# Altium PCB PCB2.PcbDoc
Units mil, origin at the board's own origin, x right, y up, seen from the top; angles counter-clockwise.
Board outline 6000 x 4000 mil, 2 copper layers (Top Layer, Bottom Layer); 2 components, 0 nets, 139 pads, 25 vias.
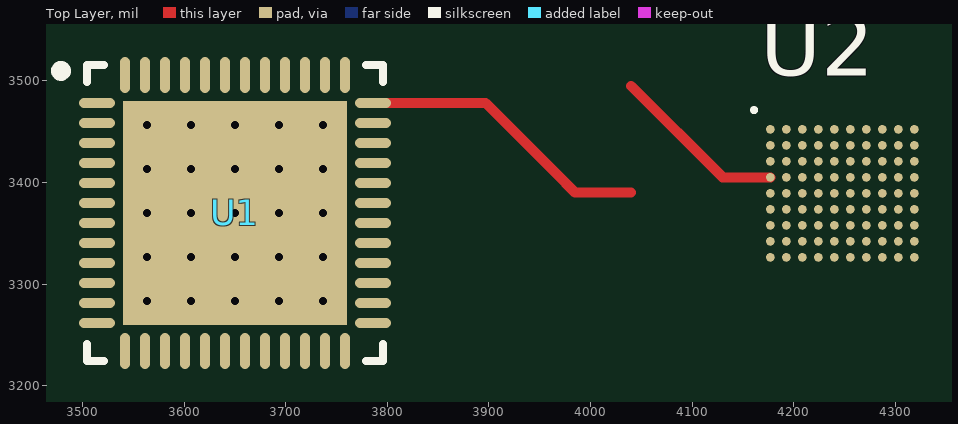
[diagram p0: Top Layer view]
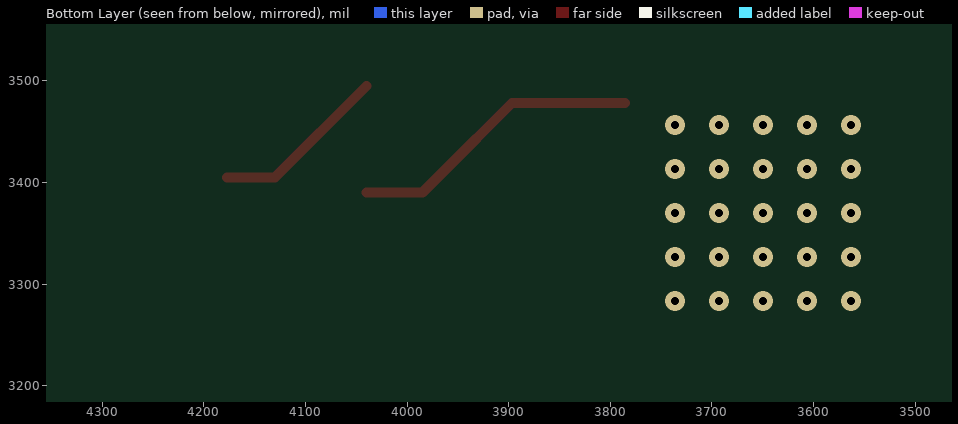
[diagram p1: Bottom Layer view, seen from below]

## Layer stack, top to bottom
Top Solder: solder mask 0.4, Solder Resist, Dk 3.5
Top Layer: signal copper 1.4
Dielectric 1: dielectric 12.6, FR-4, Dk 4.8
Bottom Layer: signal copper 1.4
Bottom Solder: solder mask 0.4, Solder Resist, Dk 3.5

## Board outline
1000,1000 7000,1000 7000,5000 1000,5000

## Design rules (kind name [scope] priority, off if disabled: settings)
Clearance [All] p1: gap=10 ignorepadtopadclearanceinfootprint=FALSE
PolygonConnect [All] p1: connectstyle=Relief reliefconductorwidth=10 reliefentries=4 polygonreliefangle="90 Angle" airgapwidth=10
RoutingVias [All] p1: holewidth=28 width=50 viastyle="Through Hole" minholewidth=28 minwidth=50 maxholewidth=28 maxwidth=50
SolderMaskExpansion [All] p1: expansion=4 istentingtop=FALSE
Width [All] p1: maxlimit=10 minlimit=10 preferedwidth=10
30 further rules are at their usual default settings.

## Components (designator, comment, footprint, x,y, rotation, side; value= is the part's Value field where it differs from the comment)
U1 "STM32F401CBU6" STM-UFQFPN48_N 3650,3370 r0 top
U2 "STM32F405OG" STM-WLCSP90 4247.87,3389.25 r0 top

## Footprints (in the part's own frame and the unit in brackets; to place one, negate y for a bottom-side part, rotate by r counter-clockwise, add the part's x,y. Pads: shape width x height; smd on the part's side, far side on the other; paste and mask are expansions set on the pad)
STM-UFQFPN48_N [mm] "QFN, 48-Leads, Body 7.1x7.1mm, Pitch 0.5mm, Thermal Pad 5.6x5.6mm, IPC Medium Density"
  oval 0.9x0.25 smd: 1(-3.45,2.75) 2(-3.45,2.25) 3(-3.45,1.75) 4(-3.45,1.25) 5(-3.45,0.75) 6(-3.45,0.25) 7(-3.45,-0.25) 8(-3.45,-0.75) 9(-3.45,-1.25) 10(-3.45,-1.75) 11(-3.45,-2.25) 12(-3.45,-2.75) 25(3.45,-2.75) 26(3.45,-2.25) 27(3.45,-1.75) 28(3.45,-1.25) 29(3.45,-0.75) 30(3.45,-0.25) 31(3.45,0.25) 32(3.45,0.75) 33(3.45,1.25) 34(3.45,1.75) 35(3.45,2.25) 36(3.45,2.75)
  oval 0.25x0.9 smd: 13(-2.75,-3.45) 14(-2.25,-3.45) 15(-1.75,-3.45) 16(-1.25,-3.45) 17(-0.75,-3.45) 18(-0.25,-3.45) 19(0.25,-3.45) 20(0.75,-3.45) 21(1.25,-3.45) 22(1.75,-3.45) 23(2.25,-3.45) 24(2.75,-3.45) 37(2.75,3.45) 38(2.25,3.45) 39(1.75,3.45) 40(1.25,3.45) 41(0.75,3.45) 42(0.25,3.45) 43(-0.25,3.45) 44(-0.75,3.45) 45(-1.25,3.45) 46(-1.75,3.45) 47(-2.25,3.45) 48(-2.75,3.45)
  rect 5.6x5.6 smd: 49(0,0)
  silkscreen extent -4.47,-3.7 3.7,3.7, body extent -3.55,-3.55 3.55,3.55, height 0.6
STM-WLCSP90 [mm] "BGA, 90-Leads, Body 3.97x4.22mm, Pitch 0.4mm"
  round 0.22 smd: A1(-1.8,1.6) A2(-1.4,1.6) A3(-1,1.6) A4(-0.6,1.6) A5(-0.2,1.6) A6(0.2,1.6) A7(0.6,1.6) A8(1,1.6) A9(1.4,1.6) A10(1.8,1.6) B1(-1.8,1.2) B2(-1.4,1.2) B3(-1,1.2) B4(-0.6,1.2) B5(-0.2,1.2) B6(0.2,1.2) B7(0.6,1.2) B8(1,1.2) B9(1.4,1.2) B10(1.8,1.2) C1(-1.8,0.8) C2(-1.4,0.8) C3(-1,0.8) C4(-0.6,0.8) C5(-0.2,0.8) C6(0.2,0.8) C7(0.6,0.8) C8(1,0.8) C9(1.4,0.8) C10(1.8,0.8) D1(-1.8,0.4) D2(-1.4,0.4) D3(-1,0.4) D4(-0.6,0.4) D5(-0.2,0.4) D6(0.2,0.4) D7(0.6,0.4) D8(1,0.4) D9(1.4,0.4) D10(1.8,0.4) E1(-1.8,0) E2(-1.4,0) E3(-1,0) E4(-0.6,0) E5(-0.2,0) E6(0.2,0) E7(0.6,0) E8(1,0) E9(1.4,0) E10(1.8,0) F1(-1.8,-0.4) F2(-1.4,-0.4) F3(-1,-0.4) F4(-0.6,-0.4) F5(-0.2,-0.4) F6(0.2,-0.4) F7(0.6,-0.4) F8(1,-0.4) F9(1.4,-0.4) F10(1.8,-0.4) G1(-1.8,-0.8) G2(-1.4,-0.8) G3(-1,-0.8) G4(-0.6,-0.8) G5(-0.2,-0.8) G6(0.2,-0.8) G7(0.6,-0.8) G8(1,-0.8) G9(1.4,-0.8) G10(1.8,-0.8) H1(-1.8,-1.2) H2(-1.4,-1.2) H3(-1,-1.2) H4(-0.6,-1.2) H5(-0.2,-1.2) H6(0.2,-1.2) H7(0.6,-1.2) H8(1,-1.2) H9(1.4,-1.2) H10(1.8,-1.2) J1(-1.8,-1.6) J2(-1.4,-1.6) J3(-1,-1.6) J4(-0.6,-1.6) J5(-0.2,-1.6) J6(0.2,-1.6) J7(0.6,-1.6) J8(1,-1.6) J9(1.4,-1.6) J10(1.8,-1.6)
  silkscreen extent -2.26,2.03 -2.16,2.13, body extent -2.11,-1.98 2.11,1.98, height 0.62

## Part data
U1: "ARM Cortex-M4 32-bit MCU+FPU, 105 DMIPS, 128 kB Flash, 64 kB Internal RAM, 36 I/Os, 48-pin UFQFPN, -40 to 85 degC, Tray", I/Os (High Current)=36, Manufacturer=STMicroelectronics, Operating Frequency(F) (Processor speed) (MHz)=84, Supplier Part Number 1=19X6215, Supply Voltage(Vcc) max (V)=3.6, Supply Voltage(Vcc) min (V)=1.8, ComponentLink1Description="Manufacturer URL", ComponentLink1URL=http://www.st.com/web/en/home.html, ComponentLink2Description=Datasheet, ComponentLink2URL=http://www.st.com/st-web-ui/static/active/en/resource/technical/document/data_brief/DM00071938.pdf, ComponentLink3Description="Package Specification", ComponentLink3URL=http://www.st.com/st-web-ui/static/active/en/resource/technical/document/data_brief/DM00071938.pdf, Core="ARM Cortex-M4", DatasheetVersion="Rev. 1", FLASH Size (Prog) (kB)=128, Internal RAM Size (kB)=64, Mounting Technology="Surface Mount", PackageDescription="48-Pin Ultra Thin Fine Pitch Quad Flat No-Lead, 7 x 7 x 0.6 mm Body, 0.5 mm Pitch, Exposed Pad", PackageReference=UFQFPN48, PackageVersion="Rev. 1, 04/2013", Packing=Tray, PartNumber=STM32F401CBU6, Supplier 1=Newark, Supplier 2=Mouser, Supplier Part Number 2=511-STM32F401CBU6
U2: "ARM Cortex-M4 32-bit MCU+FPU, 210 DMIPS, 1024 kB Flash, 192 kB Internal RAM, 72 I/Os, 90-pin WLCSP", I/Os (High Current)=72, Manufacturer=STMicroelectronics, Operating Frequency(F) (Processor speed) (MHz)=168, Supply Voltage(Vcc) max (V)=3.6, Supply Voltage(Vcc) min (V)=1.8, ComponentLink1Description="Manufacturer URL", ComponentLink1URL=http://www.st.com/web/en/home.html, ComponentLink2Description=Datasheet, ComponentLink2URL=http://www.st.com/st-web-ui/static/active/en/resource/technical/document/datasheet/DM00037051.pdf, ComponentLink3Description="Package Specification", ComponentLink3URL=http://www.st.com/st-web-ui/static/active/en/resource/technical/document/datasheet/DM00035129.pdf, Core="ARM Cortex-M4", D/A Converter=2x12-bit, DatasheetVersion="Rev. 4", FLASH Size (Prog) (kB)=1024, Internal RAM Size (kB)=192, Mounting Technology="Surface Mount", PackageDescription="90-Ball Wafer Level Chip Size Package, 0.4 mm Pitch", PackageReference=WLCSP90, PackageVersion="Rev. 4, 06/2013", PartNumber=STM32F405OG

## Via types
v1: diameter 19.68, hole 7.87, Top Layer to Bottom Layer, 25 vias

## Nets (pads, with @x,y where several pads share a name; then routed paths per layer and width w, separated by ;. In a path a pad name is that pad's centre, name@x,y a point inside that pad or via, vN(x,y) a via of type N, cw(c..) or ccw(c..) an arc to the next point about the centre after c; other vN are vias at no path point)
pads on no net: U1.1 U1.2 U1.3 U1.4 U1.5 U1.6 U1.7 U1.8 U1.9 U1.10 U1.11 U1.12 U1.13 U1.14 U1.15 U1.16 U1.17 U1.18 U1.19 U1.20 U1.21 U1.22 U1.23 U1.24 U1.25 U1.26 U1.27 U1.28 U1.29 U1.30 U1.31 U1.32 U1.33 U1.34 U1.35 U1.36 U1.37 U1.38 U1.39 U1.40 U1.41 U1.42 U1.43 U1.44 U1.45 U1.46 U1.47 U1.48 U1.49 U2.A1 U2.A2 U2.A3 U2.A4 U2.A5 U2.A6 U2.A7 U2.A8 U2.A9 U2.A10 U2.B1 U2.B2 U2.B3 U2.B4 U2.B5 U2.B6 U2.B7 U2.B8 U2.B9 U2.B10 U2.C1 U2.C2 U2.C3 U2.C4 U2.C5 U2.C6 U2.C7 U2.C8 U2.C9 U2.C10 U2.D1 U2.D2 U2.D3 U2.D4 U2.D5 U2.D6 U2.D7 U2.D8 U2.D9 U2.D10 U2.E1 U2.E2 U2.E3 U2.E4 U2.E5 U2.E6 U2.E7 U2.E8 U2.E9 U2.E10 U2.F1 U2.F2 U2.F3 U2.F4 U2.F5 U2.F6 U2.F7 U2.F8 U2.F9 U2.F10 U2.G1 U2.G2 U2.G3 U2.G4 U2.G5 U2.G6 U2.G7 U2.G8 U2.G9 U2.G10 U2.H1 U2.H2 U2.H3 U2.H4 U2.H5 U2.H6 U2.H7 U2.H8 U2.H9 U2.H10 U2.J1 U2.J2 U2.J3 U2.J4 U2.J5 U2.J6 U2.J7 U2.J8 U2.J9 U2.J10
copper on no net: | length 465
  Top Layer w10: 3785.83,3478.27 3896.73,3478.27 3965,3410 3985,3390 4040,3390 ; 4040,3495 4130,3405 4177.01,3405
  other v1: 3563.39,3283.39 3606.69,3283.39 3650,3283.39 3693.31,3283.39 3736.61,3283.39 3563.39,3326.69 3606.69,3326.69 3650,3326.69 3693.31,3326.69 3736.61,3326.69 3563.39,3370 3606.69,3370 3650,3370 3693.31,3370 3736.61,3370 3563.39,3413.31 3606.69,3413.31 3650,3413.31 3693.31,3413.31 3736.61,3413.31 3563.39,3456.61 3606.69,3456.61 3650,3456.61 3693.31,3456.61 3736.61,3456.61